# EAGLE board driver ckt_speed_2 (EAGLE 8.4.3)
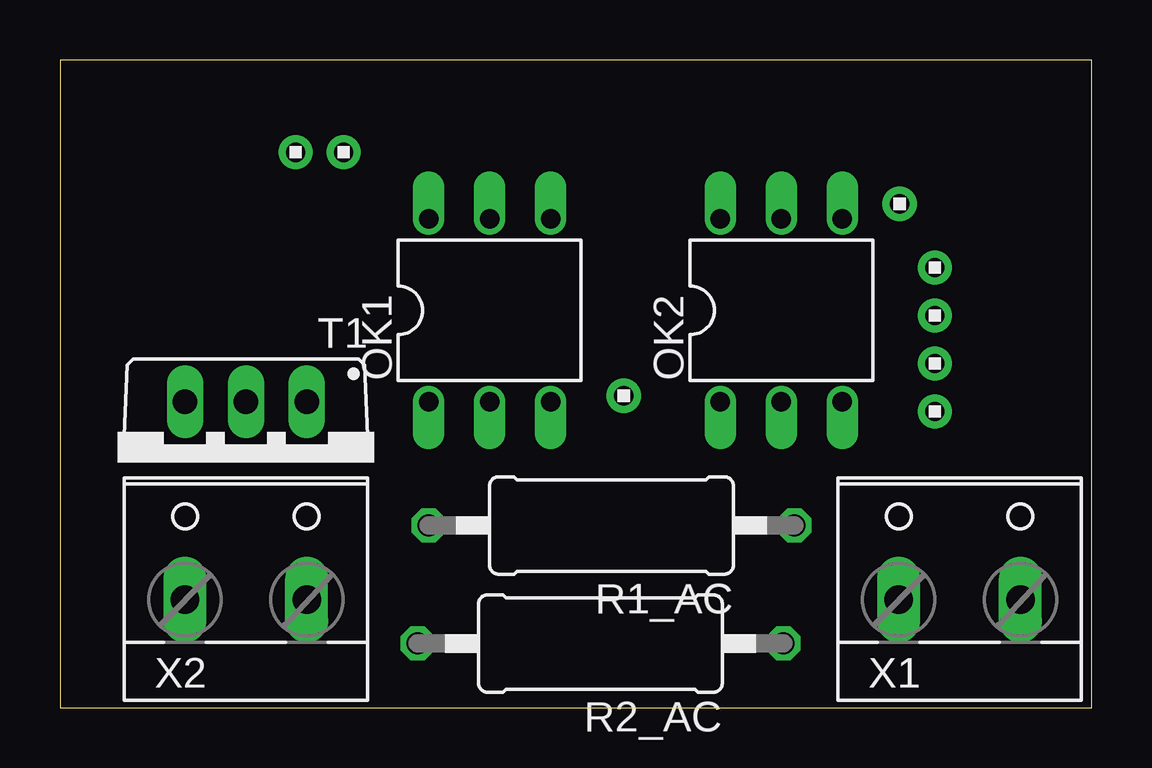
[diagram p0: board, top side]
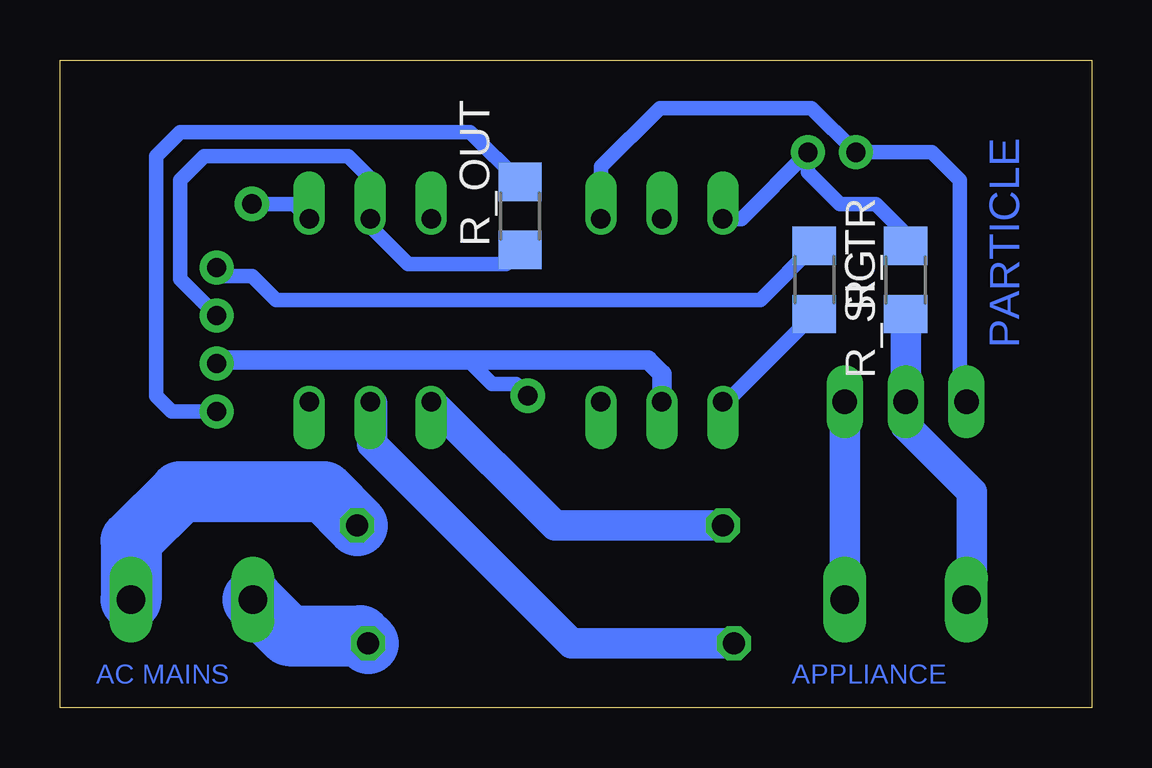
[diagram p1: board, bottom side, seen from below]

Size 43 x 27 mm. Coordinates in mm from the lower left corner, seen from the top.
Outline: 0,0 43,0 43,27 0,27 0,0
Copper layers (1*16): Top 0.035mm / dielectric 1.5mm / Bottom 0.035mm
Design rules "default": minimum track width 6mil, minimum drill 0.35mm, track to track 6mil, track to pad 6mil, pad to pad 6mil, via to via 6mil, smd to smd 6mil, copper to edge 40mil, drill to drill 6mil, minimum pad ring 10mil, minimum via ring 8mil, stop-mask expansion 4mil, vias tented up to drill 0mil, thermal gap 10mil

## Footprints (pad centres in the part's own frame; a part is rotated, then mirrored left to right if it is on the bottom)
1X1 = drill 0.8 pad 1.422: 1 0,0
1X2 = drill 0.8 pad 1.422: 1 -1,0; 2 1,0
1X4 = drill 0.8 pad 1.422: 1 -3,0; 2 -1,0; 3 1,0; 4 3,0
DIL06 = drill 0.813 offset: 1 -2.54,-3.81; 2 0,-3.81; 3 2.54,-3.81; 4 2.54,3.81; 5 0,3.81; 6 -2.54,3.81
0411/15 = drill 0.914 octagon: 1 -7.62,0; 2 7.62,0
R1206 = smd 1.6 x 1.803: 1 -1.422,0; 2 1.422,0
TO220BV = drill 1.016 long: G 2.54,-2.54; T1 -2.54,-2.54; T2 0,-2.54
W237-132 = drill 1.194 long: 1 -2.54,-0.635; 2 2.54,-0.635

## Placement (x,y rotation side)
E$1  [1X1]  35,21 0 top
E$2  [1X1]  23.5,13 0 top
JP1  1X2  [1X2]  10.82,23.15 180 top
JP3  1X4  [1X4]  36.47,15.34 90 top
OK1  MOC3021M  [DIL06]  17.91,16.56 0 top
OK2  H11A1M  [DIL06]  30.07,16.56 0 top
R1_AC  [0411/15]  22.99,7.59 180 top
R2_AC  [0411/15]  22.53,2.67 180 top
R_OUT  [R1206]  23.82,20.5 90 bottom
R_SIG  [R1206]  11.56,17.83 270 bottom
R_TR  [R1206]  7.75,17.83 90 bottom
T1  BT138-V  [TO220BV]  7.75,10.21 180 top
X1  [W237-132]  37.5,5.13 0 top
X2  [W237-132]  7.75,5.13 0 top

## Library data of the parts
E$1 E$2 JP1 JP3 = headers(2mm)
OK1 = optocoupler; MF: FAIRCHILD SEMICONDUCTOR; MPN: MOC3021-M; OC_FARNELL: 1021365; OC_NEWARK: 95B7895
OK2 = optocoupler; MPN: H11A1-M; OC_FARNELL: 1021358; OC_NEWARK: 97K1793
R1_AC R2_AC = resistor
R_OUT R_SIG R_TR = eagle-ltspice; SPICEMODEL: NONE; SPICEPREFIX: R
T1 = triac
X1 X2 = con-wago-508; OC_FARNELL: unknown; OC_NEWARK: unknown

## Nets
+5V: JP3.1 R_OUT.2
AC1: R1_AC.1 X1.2
IN: JP3.4 R_SIG.1
N$1: JP1.1 OK1.6 R_TR.2
N$2: R_TR.1 T1.T2 X2.1
N$3: T1.T1 X2.2
N$4: OK1.1 R_SIG.2
N$5: OK2.1 R1_AC.2
N$6: OK2.2 R2_AC.2
N$7: JP1.2 OK1.4 T1.G
N$8: R2_AC.1 X1.1
OUT: JP3.3 OK2.5 R_OUT.1
PE: E$2.1 JP3.2 OK1.2
S$1: E$1.1 OK2.4

## Tracks (layer width: path | path; a pad name or v marks a point on that pad's centre or on a via)
+5V
  Bottom 0.61: R_OUT.2 25.9,24 38,24 39,23 39,13 38.34,12.34 JP3.1
AC1
  Bottom 2.54: R1_AC.1 32,8.98 32,9 38,9 40.04,6.96 X1.2
IN
  Bottom 0.61: JP3.4 36.13,18 35,18 34,17 21.5,17 | 21.5,17 21,17 | R_SIG.1 13.81,17 21.5,17
N$1
  Bottom 0.61: 11.65,23.15 JP1.1 | JP1.1 14.6,20.37 OK1.6 | JP1.1 11.82,22.32 10.5,21 9,21 7.75,19.75 R_TR.2
N$2
  Bottom 1.27: R_TR.1 T1.T2 7.75,11.75 5,9 5,4.7 X2.1
N$3
  Bottom 1.27: T1.T1 X2.2
N$4
  Bottom 0.61: R_SIG.2 15.22,12.75 OK1.1
N$5
  Bottom 1.27: OK2.1 22.37,7.59 R1_AC.2
N$6
  Bottom 1.27: OK2.2 30,12.68 30,11 21.67,2.67 R2_AC.2
N$7
  Bottom 0.61: OK1.4 20.45,22.55 18,25 11.67,25 JP1.2 6.65,23.15 5.5,22 5.5,13.04 T1.G
N$8
  Bottom 2.54: R2_AC.1 30.48,3 33.47,3 X1.1
OUT
  Bottom 0.61: 23.9,19 R_OUT.1 24.4,18.5 28.5,18.5 30.07,20.07 | 30.07,20.07 OK2.5 | JP3.3 38,17.87 38,22 37,23 31,23 30,22 30,20.14 30.07,20.07
PE
  Bottom 0.61: E$2.1 24,13.5 25,13.5 26,14.5
  Bottom 0.813: OK1.2 17.91,13.91 18.5,14.5 26,14.5 36.31,14.5 JP3.2
S$1
  Bottom 0.61: OK2.4 33.24,21 E$1.1

## Text on the board
Bottom: PARTICLE | APPLIANCE | AC MAINS